# Altium PCB PCB1-plus-mini.PcbDoc
Units mil, origin at the board's own origin, x right, y up, seen from the top; angles counter-clockwise.
Board outline 6000 x 4000 mil, 2 copper layers (Top Layer, Bottom Layer); 13 components, 8 nets, 52 pads, 0 vias.
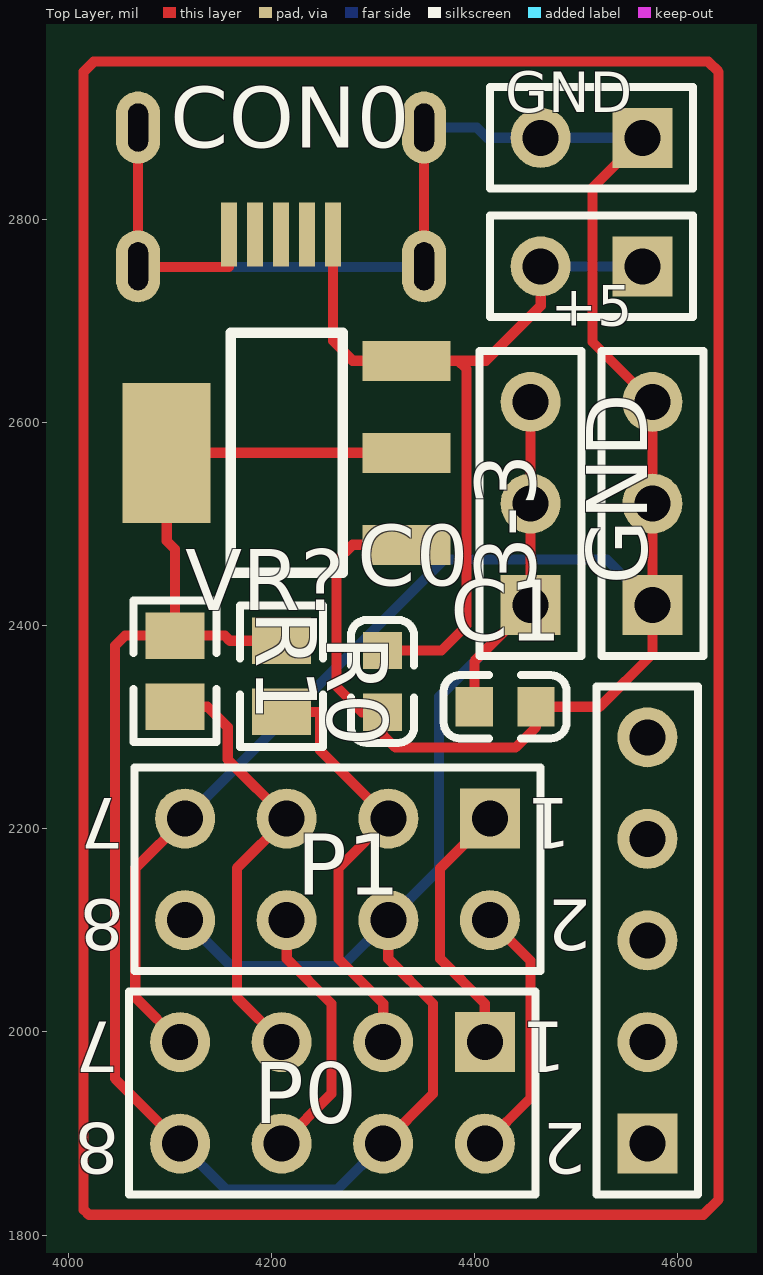
[diagram p0: Top Layer view]
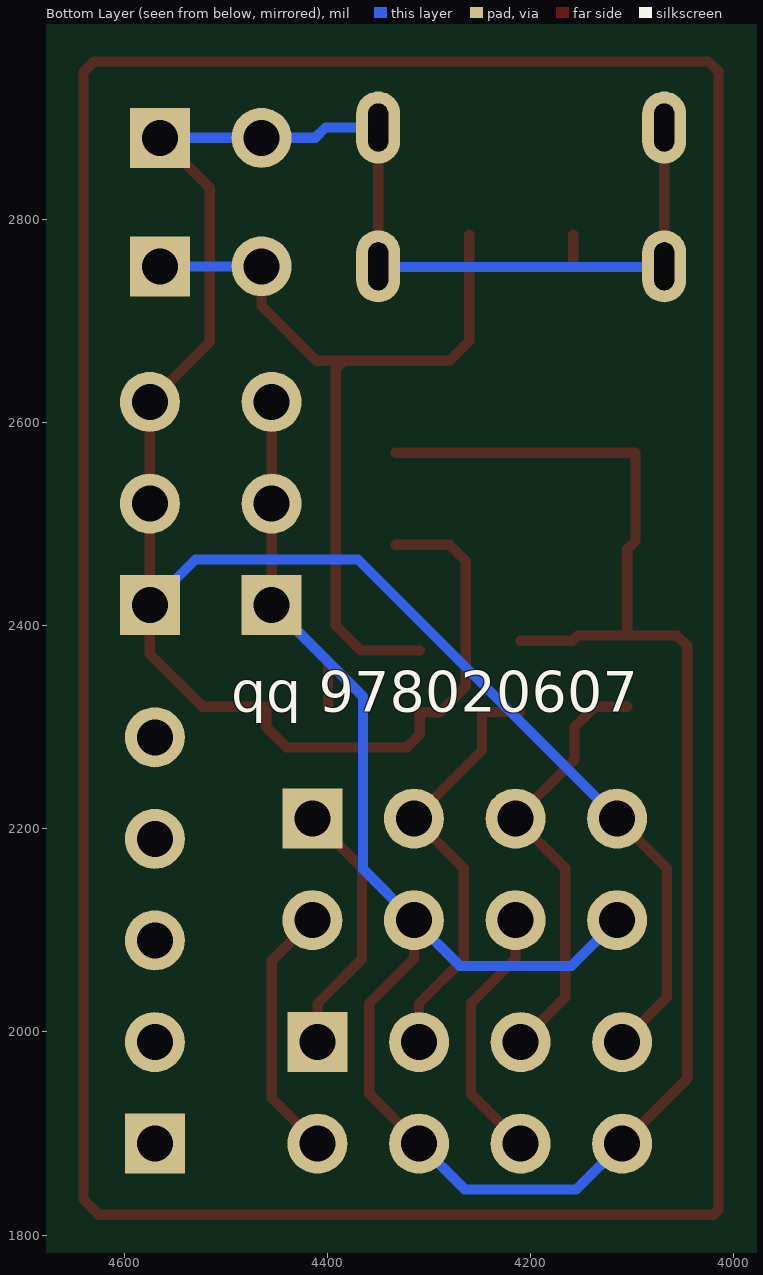
[diagram p1: Bottom Layer view, seen from below]

## Layer stack, top to bottom
Top Solder: solder mask 0.4, Solder Resist, Dk 3.5
Top Layer: signal copper 1.4
Dielectric 1: dielectric 12.6, FR-4, Dk 4.8
Bottom Layer: signal copper 1.4
Bottom Solder: solder mask 0.4, Solder Resist, Dk 3.5

## Board outline
1000,1000 7000,1000 7000,5000 1000,5000

## Design rules (kind name [scope] priority, off if disabled: settings)
Clearance [All] p1: gap=10 ignorepadtopadclearanceinfootprint=FALSE except(0: Arc-Hole Track-Hole SMDPad-Hole THPad-Hole Via-Hole Fill-Hole Poly-Hole Region-Hole Text-Hole)
PolygonConnect [All] p1: connectstyle=Relief reliefconductorwidth=10 reliefentries=4 polygonreliefangle="90 Angle" airgapwidth=10
RoomDefinition Sheet1 [InComponentClass('Sheet1')] p1: confinementstyle=ConfineIn formatcopy=TRUE lockcomponents=FALSE outline 4640.43,1824.88 4640.43,2945 4015.43,2945 4015.43,1824.88
RoutingVias [All] p1: holewidth=28 width=50 viastyle="Through Hole" minholewidth=28 minwidth=50 maxholewidth=28 maxwidth=50
SolderMaskExpansion [All] p1: expansion=4
Width [All] p1: maxlimit=10 minlimit=10 preferedwidth=10
30 further rules are at their usual default settings.

## Classes and differential pairs
component class Sheet1: 3-3 +5 C0 C1 CON0 GND P0 P1 R0

## Components (designator, comment, footprint, x,y, rotation, side; value= is the part's Value field where it differs from the comment)
3-3 "Header 3" HDR1X3 4455,2420 r90 top
+5 "Header 2" HDR1X2 4565,2753.5 r180 top (schematic designator P2)
C0 "10uF (106) 10% 10V" LC-0603_C 4309.32,2345 r90 top
C1 "10uF (106) 10% 10V" LC-0603_C 4430,2320 r180 top
CON0 "USB_Connector" MicroUSB 4209.41,2753.5 r270 top
GND "Header 2" HDR1X2 4565,2880 r180 top (schematic designator P3)
GND "Header 3" HDR1X3 4575,2420 r90 top
P0 "Header 4X2" HDR2X4 4410,1990 r180 top
P1 "Header 4X2" HDR2X4 4415,2210 r180 top
R0 "10KΩ (1002) ±1%" LC-0805_R 4210,2350 r90 top
R1 "10KΩ (1002) ±1%" LC-0805_R 4105,2355.04 r90 top
VR? "AMS1117-3.3" LC-SOT-223 4215,2570 r0 top
? "Comment" HDR1X5 4570,1890 r90 top

## Footprints (in the part's own frame and the unit in brackets; to place one, negate y for a bottom-side part, rotate by r counter-clockwise, add the part's x,y. Pads: shape width x height; smd on the part's side, far side on the other; paste and mask are expansions set on the pad)
HDR1X2 [mm] "Connector; Header; 2 Position"
  rect 1.5x1.5 hole 0.9: 1(0,0)
  round 1.5 hole 0.9: 2(2.54,0)
  silkscreen extent -1.27,-1.27 3.81,1.27
HDR1X3 [mm] "Connector; Header; 3 Position"
  rect 1.5x1.5 hole 0.9: 1(0,0)
  round 1.5 hole 0.9: 2(2.54,0) 3(5.08,0)
  silkscreen extent -1.27,-1.27 6.35,1.27
HDR1X5 [mm] "Connector; Header; 5 Position"
  rect 1.5x1.5 hole 0.9: 1(0,0)
  round 1.5 hole 0.9: 2(2.54,0) 3(5.08,0) 4(7.62,0) 5(10.16,0)
  silkscreen extent -1.27,-1.27 11.43,1.27
HDR2X4 [mm] "Connector; Header; 4x2 Position"
  rect 1.5x1.5 hole 0.9: 1(0,0)
  round 1.5 hole 0.9: 2(0,2.54) 3(2.54,0) 4(2.54,2.54) 5(5.08,0) 6(5.08,2.54) 7(7.62,0) 8(7.62,2.54)
  silkscreen extent -1.27,-1.27 8.89,3.81
LC-0603_C [mm]
  rect 0.93x0.98 smd: 1(-0.77,0) 2(0.77,0)
  silkscreen extent -1.53,-0.79 1.54,0.79, body extent -0.8,-0.4 0.8,0.4, height 0.3
LC-0805_R [mm]
  rect 1.16x1.47 smd: 1(-0.89,0) 2(0.89,0)
  silkscreen extent -1.77,-1.03 1.77,1.03, body extent -1,-0.62 1,0.63, height 0.49
LC-SOT-223 [mm]
  rect 2.2x1 smd: 1(3,-2.3) 2(3,0) 3(3,2.3)
  rect 2.2x3.5 smd: 2(-3,0)
  silkscreen extent -1.4,-3 1.4,3, body extent -3.49,-3.24 3.49,3.24, height 1.64
MicroUSB [mm]
  rect 1.6x0.4 smd mask+0.05: 1(-0.8,1.3) 2(-0.8,0.65) 3(-0.8,0) 4(-0.8,-0.65) 5(-0.8,-1.3)
  oval 1.8x1.1 hole 0.5 slot 1.2 at 0 deg: GND(-3.47,3.575) GND(-3.47,-3.575) GND(0,3.575) GND(0,-3.575)

## Part data
3-3 GND: "Header, 3-Pin", LatestRevisionDate=17-Jul-2002, LatestRevisionNote="Re-released for DXP Platform.", Publisher="Altium Limited"
+5 GND: "Header, 2-Pin", LatestRevisionDate=17-Jul-2002, LatestRevisionNote="Re-released for DXP Platform.", Publisher="Altium Limited"
C0 C1: library part "0603 10uF (106) 10% 10V", "贴片电容", Package=0603, SuppliersPartNumber=C19702, ComponentLink1Description=供应商, ComponentLink1URL=http://www.szlcsc.com/product/details_20411.html, Supplier=LC
P0 P1: "Header, 4-Pin, Dual row", LatestRevisionDate=17-Jul-2002, LatestRevisionNote="Re-released for DXP Platform.", Publisher="Altium Limited"
R0 R1: library part "0805 10KΩ (1002) 1%", "贴片电阻", Package=0805, SuppliersPartNumber=C17414, ComponentLink1Description=供应商, ComponentLink1URL=http://www.szlcsc.com/product/details_18102.html, Supplier=LC
VR?: library part "SOT-223 AMS1117-3.3", "低压差线性稳压(LDO)", Package=SOT-223, SuppliersPartNumber=C6186, ComponentLink1Description=供应商, ComponentLink1URL=http://www.szlcsc.com/product/details_6652.html, Supplier=LC

## Nets (pads, with @x,y where several pads share a name; then routed paths per layer and width w, separated by ;. In a path a pad name is that pad's centre, name@x,y a point inside that pad or via, vN(x,y) a via of type N, cw(c..) or ccw(c..) an arc to the next point about the centre after c; other vN are vias at no path point)
Net3-3_1: 3-3.1 3-3.2 3-3.3 C1.2 P0.4 P0.8 P1.4 P1.8 R0.2 R1.2 VR?.2 | length 2530.3
  Top Layer w10: P0.8 4046,1954 4046,2380 4056.08,2390.08 R1.2 ; R0.2 4159.04,2385.04 4154,2390.08 R1.2 ; P0.4 4359,1939 4359,2028 4315,2072 P1.4 ; VR?.2@4333.11,2570 4096.89,2570 4096.89,2483.11 4105,2475 R1.2 ; C1.2 4399.68,2364.68 3-3.1 3-3.2 3-3.3
  Bottom Layer w10: P0.8 4155,1845 4265,1845 P0.4 ; P1.8 4160,2065 4270,2065 P1.4 4365,2160 4365,2330 3-3.1
NetC0_1: C0.1 C1.1 CON0.5 CON0.GND GND.1 GND.2 GND.3 P0.7 P1.7 VR?.1 | length 2890.1
  Top Layer w10: CON0.GND@4068.66,2890.12 4068.66,2753.5 4068.66,2753 4158.23,2753 CON0.5 ; P0.7 4066,2034 4066,2161 P1.7 ; VR?.1 4280,2479.45 4264,2463.45 4264,2340 4289.31,2314.69 C0.1 4309.32,2292.68 4322,2280 4440.31,2280 4460.31,2300 C1.1 4523,2320 4575,2372 4575,2420 4575,2520 GND.3 4516,2679 4516,2831 GND.1@4565,2880 ; CON0.GND@4350.16,2753.5 CON0.GND@4350.16,2890.12
  Bottom Layer w10: CON0.GND@4068.66,2753.5 4068.66,2753 4350.16,2753 CON0.GND@4350.16,2753.5 ; P1.7 4370,2465 4530,2465 GND.1@4575,2420 ; CON0.GND@4350.16,2890.12 4402,2890.12 4412.12,2880 4465,2880 GND.1@4565,2880
NetC0_2: +5.1 +5.2 C0.2 CON0.1 VR?.3 | length 835.6
  Top Layer w10: CON0.1 4260.59,2679.96 4280,2660.55 VR?.3 4384,2660.55 ; C0.2 4367.32,2375.32 4392,2400 4392,2652.55 4384,2660.55 ; +5.2 4465,2714.55 4411,2660.55 4384,2660.55
  Bottom Layer w10: +5.2 +5.1
NetP0_1: P0.1 P1.1 | length 258.5
  Top Layer w10: P0.1 4410,2028 4366,2072 4366,2161 P1.1
NetP0_2: P0.2 P1.2 | length 255.2
  Top Layer w10: P0.2 4455,1935 4455,2070 P1.2
NetP0_3: P0.3 P1.3 R0.1 | length 429.2
  Top Layer w10: R0.1 4248,2314.96 4248,2277 P1.3 4266,2161 4266,2072 4310,2028 P0.3
NetP0_5: P0.5 P1.5 R1.1 | length 432.8
  Top Layer w10: R1.1 4137,2320 4157,2300 4157,2268 P1.5 4166,2161 4166,2034 P0.5
NetP0_6: P0.6 P1.6 | length 258.5
  Top Layer w10: P0.6 4259,1939 4259,2028 4215,2072 P1.6
pads on no net: ?.1 ?.2 ?.3 ?.4 ?.5 CON0.2 CON0.3 CON0.4
copper on no net: | length 3496.6
  Top Layer w10: 4015.12,1824.88 4015.12,2945.12 4025,2955 4630,2955 4640.12,2944.88 4640.12,1835 4625.12,1820 4020.32,1820 4015.43,1824.88 4015.12,1824.88

## Silkscreen, mask and mechanical layers (free items; w line width, h text height)
Bottom Overlay:
  text "qq 978020607" at 4495,2315 h40

## Text inside footprints (layer, text, board x,y; h text height)
P0: Top Overlay "8" at 4050,1910 h50 r180; Top Overlay "7" at 4050,2010 h50 r180; Top Overlay "1" at 4490,2010 h50 r180; Top Overlay "2" at 4510,1910 h50 r180
P1: Top Overlay "8" at 4055,2130 h50 r180; Top Overlay "7" at 4055,2230 h50 r180; Top Overlay "1" at 4495,2230 h50 r180; Top Overlay "2" at 4515,2130 h50 r180